# Altium PCB Mach khoa so dien tu - Bao.PcbDoc
Units mm, origin at the board's own origin, x right, y up, seen from the top; angles counter-clockwise.
Board outline 125.35 x 56.13 mm, 2 copper layers (Top Layer, Bottom Layer); 26 components, 29 nets, 102 pads, 0 vias.
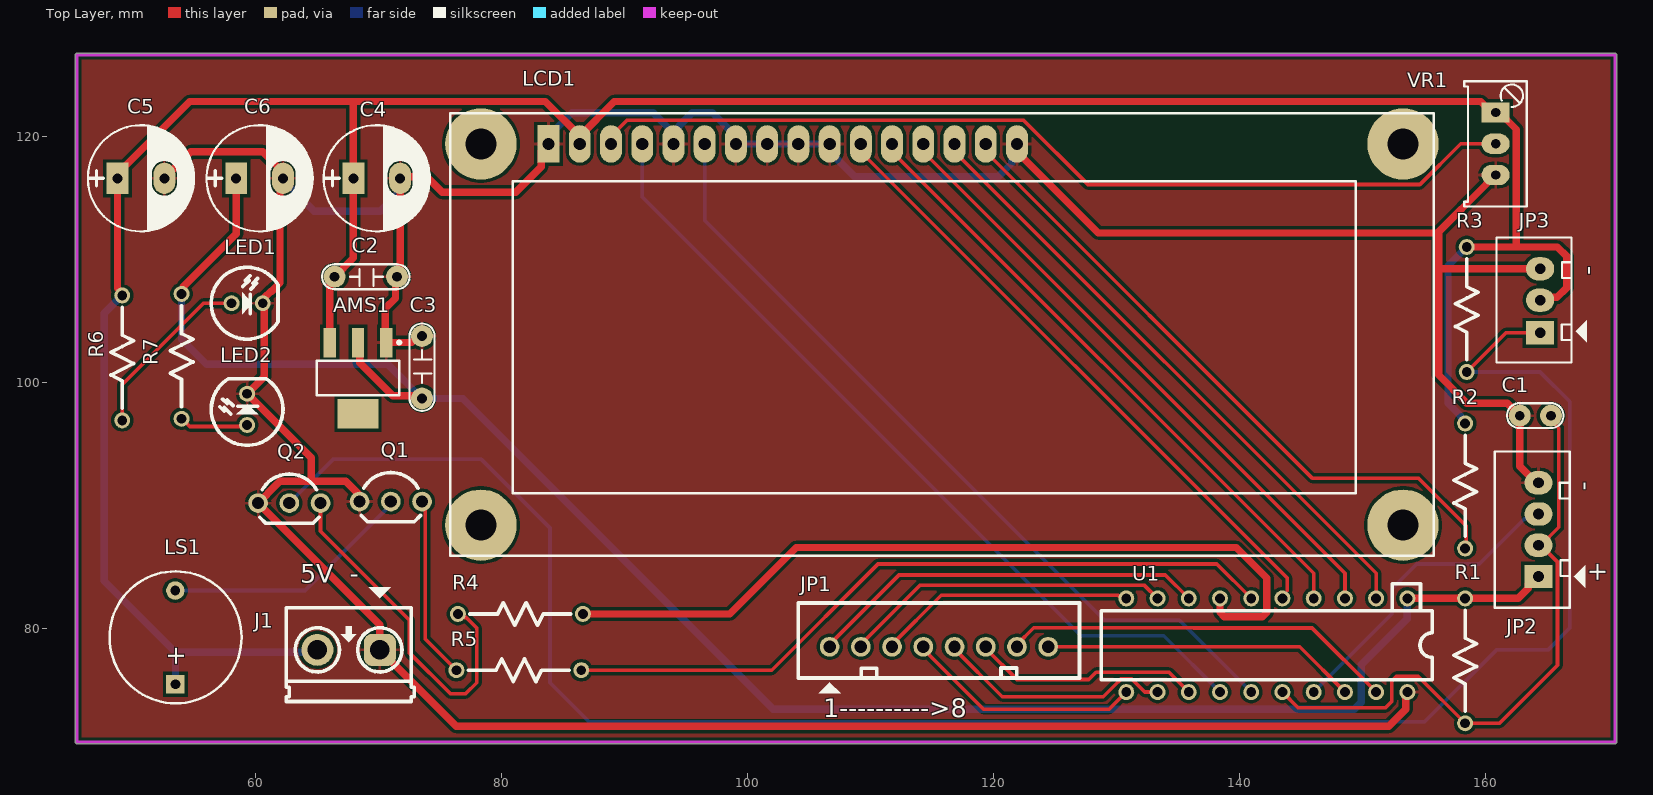
[diagram p0: Top Layer view]
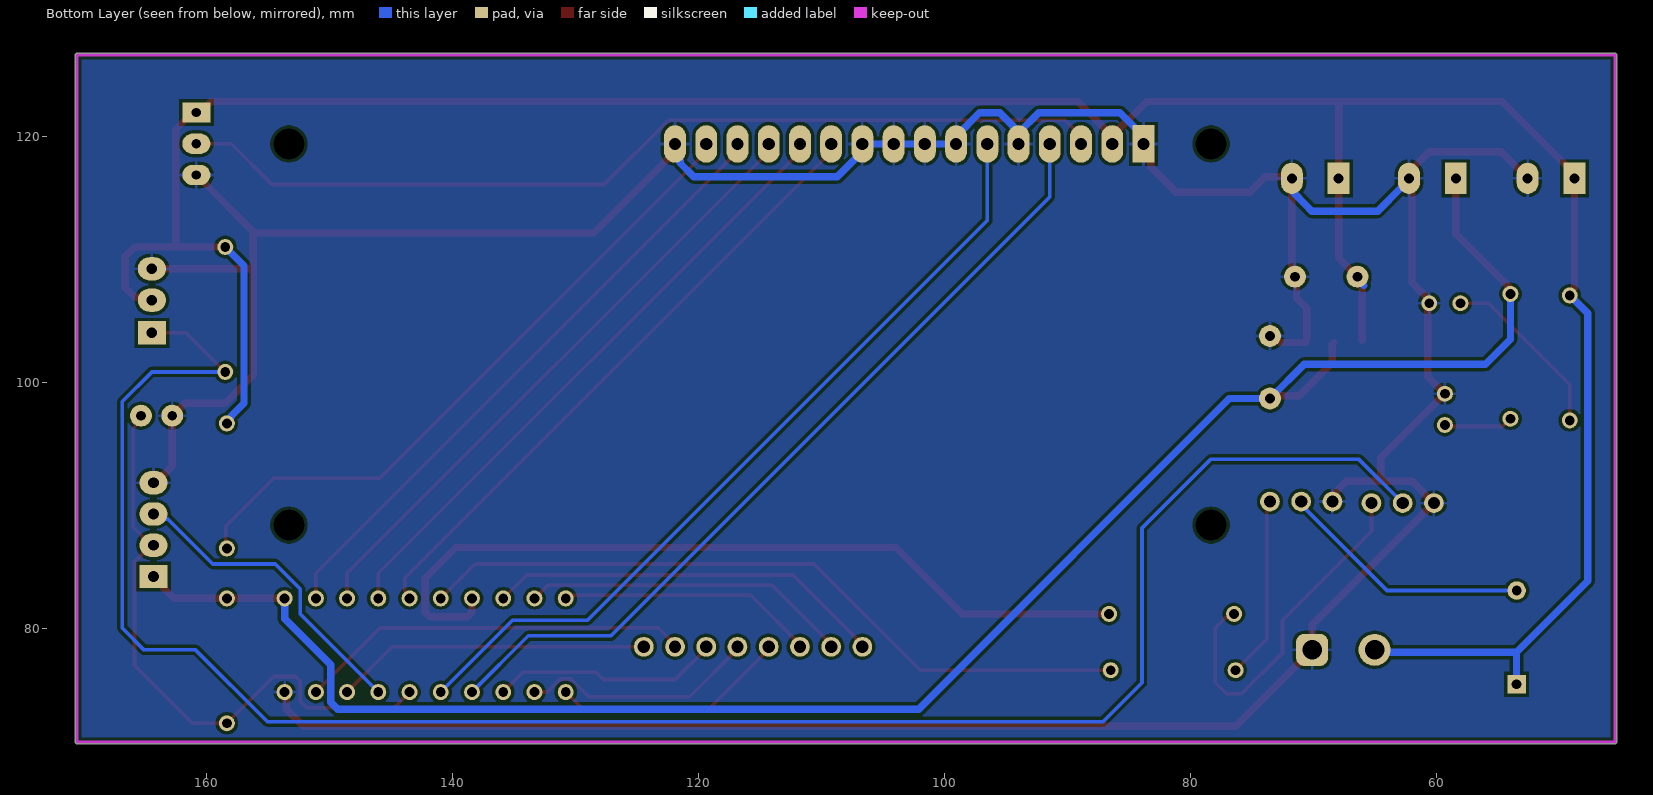
[diagram p1: Bottom Layer view, seen from below]

## Layer stack, top to bottom
Top Solder: solder mask 0.0102, Solder Resist, Dk 3.5
Top Layer: signal copper 0.0356
Dielectric 1: dielectric 0.32, FR-4, Dk 4.8
Bottom Layer: signal copper 0.0356
Bottom Solder: solder mask 0.0102, Solder Resist, Dk 3.5

## Board outline
45.466,70.612 cw(c45.466,70.739) 45.339,70.739 45.339,126.619 cw(c45.466,126.619) 45.466,126.746 170.561,126.746 cw(c170.561,126.619) 170.688,126.619 170.688,70.739 cw(c170.561,70.739) 170.561,70.612

## Design rules (kind name [scope] priority, off if disabled: settings)
Clearance [All] p1: gap=0.254 ignorepadtopadclearanceinfootprint=FALSE except(0: Arc-Hole Track-Hole SMDPad-Hole THPad-Hole Via-Hole Fill-Hole Poly-Hole Region-Hole Text-Hole)
PolygonConnect [All] p1: connectstyle=Relief reliefconductorwidth=0.254 reliefentries=4 polygonreliefangle="90 Angle" airgapwidth=0.254
RoutingVias [All] p1: holewidth=0.711 width=1.27 viastyle="Through Hole" minholewidth=0.711 minwidth=1.27 maxholewidth=0.711 maxwidth=1.27
SolderMaskExpansion [All] p1: expansion=0.102 istentingtop=FALSE
Width "Width power" [InNetClass('power ')] p1: maxlimit=1 minlimit=0.2 preferedwidth=0.6
Width "Width signal" [InNetClass('signal')] p2: maxlimit=0.5 minlimit=0.1 preferedwidth=0.3
30 further rules are at their usual default settings.

## Classes and differential pairs
net class signal: "DATA 4" "DATA 5" "DATA 6" "DATA 7" "KEY 1" "KEY 2" "KEY 3" "KEY 4" "KEY 5" "KEY 6" "KEY 7" "KEY 8" "LCD EN" "LCD RS" NetJP3_1 NetLCD1_3 NetLCD1_15 NetLED1_1 NetLED2_1 NetLS1_2 NetQ1_3 NetQ2_3 RST SPEAKER TEST
net class power: 3.3V 5V GND MOTOR
component class "nl mạch khóa số điện tử": C1 C5 J1 JP1 JP3 LED1 LED2 LS1 Q1 Q2 R1 R2 R3 R4 R5 R6 R7 U1

## Components (designator, comment, footprint, x,y, rotation, side; value= is the part's Value field where it differs from the comment)
AMS1 "AMS1117-3.3V" SOT223 68.326,100.33 r180 top value="AMS1117-3.3V SOT223"
C1 "100pF" CN1 165.354,97.282 r180 top
C2 "104" CN2 71.501,108.585 r180 top value=0.1uF
C3 "104" CN2 73.533,103.759 r270 top value=0.1uF
C4 "1000uF/16V" CP1.5/3.4 67.945,116.586 r0 top
C5 "1000uF/16V" CP1.5/3.4 48.768,116.586 r0 top
C6 "1000uF/16V" CP1.5/3.4 58.42,116.586 r0 top
J1 "OSTTC-02-2162" STB02 67.564,78.232 r180 top value="Terminal Block"
JP1 "JP8" CON8 115.57,78.486 r0 top value="Connector 8"
JP2 "JP4" CON4 164.338,84.201 r90 top value="Connector 4"
JP3 "JP3" CON3 164.465,104.14 r90 top value="Connector 3"
LCD1 "LCD 16x2A" LCD16x2 83.82,119.38 r0 top value=LCD16x2A
LED1 "RED LED 5mm" LED5R 58.039,106.426 r0 top
LED2 "LED_G_5" LED5G 59.309,96.52 r90 top value=Green
LS1 "Coi Chip Speaker" "Coi Chip Speacker" 53.48,75.438 r90 top
Q1 "2SC1815" 2SC1815 70.993,90.297 r0 top
Q2 "2SC1815" 2SC1815 62.738,90.17 r0 top
R1 "Res1/4W" CFR25S 158.369,72.263 r90 top value=1K
R2 "Res1/4W" CFR25S 158.369,86.487 r90 top value=1K
R3 "Res1/4W" CFR25S 158.496,110.998 r270 top value=1K
R4 "Res1/4W" CFR25S 86.614,81.153 r180 top value=1K
R5 "Res1/4W" CFR25S 86.487,76.581 r180 top value=1K
R6 "Res1/4W" CFR25S 49.149,107.061 r270 top value=1K
R7 "Res1/4W" CFR25S 53.975,107.188 r270 top value=1K
U1 "MSP430G2252IN20" MSP430G2552 153.67,82.423 r180 top
VR1 "10K" VR1 160.842,121.937 r270 top value="VR 10K"

## Footprints (in the part's own frame and the unit in brackets; to place one, negate y for a bottom-side part, rotate by r counter-clockwise, add the part's x,y. Pads: shape width x height; smd on the part's side, far side on the other; paste and mask are expansions set on the pad)
2SC1815 [mm] "TO-92 Body Dia. 4.5mm; Leads 0.51 x 0.48 mm (max)"
  round 1.6 hole 1 mask+0.1: 1(-2.54,0) 2(0,0)
  round 1.6 hole 1: 3(2.54,0)
  silkscreen extent -2.41,-1.65 2.41,2.37, body extent -2.79,-1.59 2.79,2.61, height 10
CFR25S [mm] "RESISTOR_1/4W"
  round 1.3 hole 0.8: 1(0,0) 2(10.16,0)
  silkscreen extent 0.98,-0.92 9.18,0.92, body extent -0.3,-1.16 10.47,1.16, height 2.93
CN1 [mil]
  round 70 hole 31: 1(0,0) 2(100,0)
  silkscreen extent -40,-40 141,40, body extent -60,-30 170,37, height 265
CN2 [mil]
  round 70 hole 31: 1(0,0) 2(200,0)
  silkscreen extent -40,-40 240,40, body extent -54,-44 260,55, height 407
"Coi Chip Speacker" [mm]
  rect 1.5x1.5 hole 0.8: 1(0,0)
  round 1.5 hole 0.8: 2(7.62,0.013)
  silkscreen extent -1.55,-5.38 9.18,5.36, body extent -2.22,-6 13.24,6, height 4.5
CON3 [mil] "CON 3"
  rect 75x90 hole 34: 1(-5,0)
  oval 75x90 hole 34: 2(100,0) 3(200,0)
  silkscreen extent -100,-150 300,140, body extent -95,-90 295,136, height 276
CON4 [mil] "CON4"
  rect 75x90 hole 34: 1(0,0)
  oval 75x90 hole 34: 2(100,0) 3(200,0) 4(300,0)
  silkscreen extent -100,-150 400,140, body extent -90,-90 398,136, height 276
CON8 [mm] "CON8"
  round 1.6 hole 1 mask+0.1: 1(-8.89,0) 2(-6.35,0) 3(-3.81,0) 4(-1.27,0) 5(1.27,0) 6(3.81,0) 7(6.35,0) 8(8.89,0)
  silkscreen extent -11.43,-3.8 11.43,3.56, body extent -11.3,-2.29 11.3,3.41, height 7
CP1.5/3.4 [mil] "Tu hoa 220->470uF,16V, 470uF/16V,25V"
  rect 70x100 hole 32: 1(0,0)
  oval 70x100 hole 32: 2(150,0)
  silkscreen extent -95,-170 245,170, body extent -85,-157 230,157, height 446
LCD16x2 [mm] "LCD dipslay 16x2, 16 pin"
  rect 1.778x3.048 hole 1: 1(0,0)
  oval 1.778x3.048 hole 1: 2(2.54,0) 3(5.08,0) 4(7.62,0) 5(10.16,0) 6(12.7,0) 7(15.24,0) 8(17.78,0) 9(20.32,0) 10(22.86,0) 11(25.4,0) 12(27.94,0) 13(30.48,0) 14(33.02,0) 15(35.56,0) 16(38.1,0)
  round 5.8 / inner round 0 / far side round 0 hole 2.5 unplated: M1(-5.5,0) M2(69.5,0) M3(-5.5,-31) M4(69.5,-31)
  silkscreen extent -8,-33.5 72,2.5, body extent -8.13,-34.47 72.37,2.03, height 18.14
LED5G [mm] "LED, GREEN, 2 LEAD, 5mm"
  round 1.3 hole 0.8: 1(0,0) 2(2.54,0)
  silkscreen extent -1.65,-2.92 3.77,2.92, body extent -1.71,-3.01 3.71,3.01, height 12.31
LED5R [mm] "LED, RED, 2 LEAD, 5mm"
  round 1.3 hole 0.8: 1(0,0) 2(2.54,0)
  silkscreen extent -1.65,-2.92 3.77,2.92, body extent -1.71,-3.01 3.71,3.01, height 12.31
MSP430G2552 [mm] "DIP 20, 20 PIN, W 300mil, Pin to pin 100mil"
  round 1.3 hole 0.8: 1(0,0) 2(2.54,0) 3(5.08,0) 4(7.62,0) 5(10.16,0) 6(12.7,0) 7(15.24,0) 8(17.78,0) 9(20.32,0) 10(22.86,0) 11(22.86,7.62) 12(20.32,7.62) 13(17.78,7.62) 14(15.24,7.62) 15(12.7,7.62) 16(10.16,7.62) 17(7.62,7.62) 18(5.08,7.62) 19(2.54,7.62) 20(0,7.62)
  silkscreen extent -2.03,-1.19 24.89,6.61, body extent -2.31,-0.46 24,8.18, height 3.94
SOT223 [mm]
  rect 1x2.4 smd: 1(-2.3,-2.9) 2(0,-2.9) 3(2.3,-2.9)
  rect 3.3x2.4 smd: 4(0,2.9)
  silkscreen extent -3.48,-3.02 3.35,1.4, body extent -3.25,-3.56 3.25,3.4, height 1.68
STB02 [mm] "Connector; Screw Terminal block; 2 Position; Blue"
  rrect50% 2.6x2.6 hole 1.6: 1(-2.54,0)
  round 2.6 hole 1.6: 2(2.54,0)
  silkscreen extent -5.33,-5.08 5.08,4.19, body extent -5.68,-4.05 5.08,4.95, height 12.5
VR1 [mil] "Variable Resistor"
  rect 65x90 hole 30: 1(0,0)
  oval 65x90 hole 30: 2(100,0) 3(200,0)
  silkscreen extent -100,-100 301,100, body extent -88,-130 288,110, height 455

## Part data
AMS1: library part "AMS1117 SMD", "Dán", Chung_Loai=Dán, Don_Vi=Con, Ma_Hang=MH000596
C1: library part CN1, "Cap np  1pF - 472pF"
C2 C3: library part CN2, "Cap np 104 => 105pF"
C4 C5 C6: library part CP4, "Cap 1000uF/16V - 220uF/50V", Description 1="2200uF-3300uF/6,3V - 1000uF-2200uF/10V", Description 2="1000uF/16V - 470uF => 1000uF/25V - 100uF/100V", Description 3=330uF>470uF/35V_220uF>470uF/50V_10uF>22uF/250V, Description 4="220uF => 330uF/63V - 10uF =>33uF/160 - 200V", Description 5="4,7uF>10uF/250V_3,3uF>10uF/400V - 2,2uF>4,7uF/450V"
J1: "Terminal Block 2 Poles 5.08mm Blue", ComponentLink1Description=Datasheet, ComponentLink1URL="D:\Dropbox\Datasheets\Passive Components\Connectors\OSTTC-XX-2162.pdf", Unit Price=0.076
JP1: library part Con8, "Connector 8"
JP2: library part Con4, "Connector 4"
JP3: library part Con3, "Connector 3"
LCD1: library part LCD16x2A, "LCD dipslay 16 char, 2 line"
LED1: library part LED_RED_5MM_1, "LED Red 5mm", Color=Red, Current - Test=10mA, manufacturer="Broadcom Limited", Manufacturer Part Number=HLMP-3316, Millicandela Rating=60mcd, Package / Case=Radial, Supplier Device Package="T-1 3/4", Supplier Part Number 1=516-1335-ND, Voltage - Forward (Vf) (Typ)=1.9V, BuyLink=http://www.tme.vn/Product.aspx?id=1277#page=pro_info, Category=Optoelectronics, ComponentLink1Description=https://docs.broadcom.com/docs/AV02-1023EN, ComponentLink1URL=https://docs.broadcom.com/docs/AV02-1023EN, Cost (VNĐ)=1000, Features=-, Height (Max)=9.19mm, Lens Color=Red, Lens Style/Size="Round with Domed Top, 5mm (T-1 3/4), 4.83mm", Lens Transparency=Clear, Mounting Type="Through Hole", Packaging=Bulk, Part Status=Active, Pricing 1="1=0.41, 10=0.294, 25=0.24, 100=0.192, 250=0.162, 500=0.138, 1000=0.108, 2500=0.099 (USD)", RoHS="RoHS Compliant", Size / Dimension=-, Stock 1=11943, Supplier 1=Digi-Key, Viewing Angle=35°, Wavelength - Dominant=626nm, Wavelength - Peak=635nm
LED2: library part LED_GREEN_5MM, "LED Green 5mm", ComponentLink1Description=Datasheet, ComponentLink1URL="D:\Dropbox\Datasheets\Opto and Illumination\LEDs\SMD LED.pdf", Unit Price=0.0476
LS1: "Còi chip"
Q1 Q2: "Trans NPN 50V 150mA TO-92", ComponentLink1Description=Datasheet, ComponentLink1URL="D:\Dropbox\Datasheets\Transistors\P Channel Bipolar\2SC1815.pdf", Unit Price=0.0143
R1 R2 R3 R4 R5 R6 R7: "Resistor", LatestRevisionDate=17-Jul-2002, LatestRevisionNote="Re-released for DXP Platform.", PackageDescription="Axial Device, Thru-Hole; 2 Leads; 0.3 in Pin Spacing", PackageReference=AXIAL-0.3, Published=8-Jun-2000, Publisher="Altium Limited"
U1: "MCU 16bit 16KB 1.8-3.6V 16MHz DIP20", ComponentLink1Description=Datasheet, ComponentLink1URL="D:\Dropbox\Datasheets\Microcontrolers\MSP430\MSP430x2xx Family\MSP430G2553.pdf", Unit Price=1.0000
VR1: library part VR2, "Var Resistor"

## Nets (pads, with @x,y where several pads share a name; then routed paths per layer and width w, separated by ;. In a path a pad name is that pad's centre, name@x,y a point inside that pad or via, vN(x,y) a via of type N, cw(c..) or ccw(c..) an arc to the next point about the centre after c; other vN are vias at no path point)
3.3V: AMS1.2 C3.2 C6.1 JP2.1 R1.2 R7.1 U1.1 | length 154.1
  Top Layer w0.6: R7.1 54.109,107.322 54.109,107.769 58.42,112.08 C6.1@58.42,116.459 ; AMS1.2 68.461,103.095 68.461,101.592 71.149,98.904 73.308,98.904 C3.2 ; U1.1 R1.2@158.877,82.423 ; R1.2@158.75,82.423 162.618,82.423 ; 162.687,82.423 163.495,83.231 JP2.1@163.495,83.548 ; JP2.1@164.147,84.201 JP2.1 ; JP2.1@164.211,84.074 164.02,84.074 JP2.1@163.495,83.548 ; JP2.1@164.306,84.042 163.989,84.042 JP2.1@163.495,83.548
  Bottom Layer w0.6: R7.1 53.975,103.505 56.007,101.473 70.739,101.473 C3.2 76.835,98.679 102.108,73.406 149.352,73.406 149.926,73.98 149.926,77.028 153.67,80.772 U1.1
5V: AMS1.3 C2.2 C4.1 C5.1 J1.2 JP3.2 LCD1.2 LS1.1 R2.2 R3.1 R6.1 VR1.1 | length 236.6
  Top Layer w0.6: R6.1 49.149,107.25 48.768,107.631 48.768,116.967 54.635,122.834 67.945,122.834 ; AMS1.3@66.04,103.423 66.04,107.885 66.421,108.266 C2.2 67.945,110.109 67.945,116.713 67.945,122.834 ; LCD1.2 LCD1.2@86.36,120.015 ; R3.1 162.539,110.998 ; JP3.2 164.699,106.914 165.842,106.914 166.624,107.696 166.624,110.236 165.862,110.998 162.539,110.998 ; 67.945,122.834 83.562,122.834 86.36,120.036 LCD1.2@86.36,120.015 ; LCD1.2@86.36,120.015 89.179,122.834 159.628,122.834 160.525,121.937 161.16,121.937 162.539,120.558 162.539,110.998
  Bottom Layer w0.6: R6.1 47.696,105.608 47.696,83.838 53.48,78.054 ; LS1.1 53.48,78.054 ; J1.2 64.846,78.054 53.48,78.054 ; 65.891,107.866 66.61,108.585 C2.2@66.929,108.585 ; R2.2 158.369,96.836 158.019,97.186 158.019,97.251 156.972,98.298 156.972,109.474 R3.1
"DATA 4": LCD1.11 U1.5 | length 50.7
  Top Layer w0.3: LCD1.11 109.22,118.745 143.891,84.074 143.891,83.058
"DATA 5": LCD1.12 U1.4 | length 51.2
  Top Layer w0.3: LCD1.12 111.76,118.745 146.05,84.455 U1.4
"DATA 6": LCD1.13 U1.3 | length 51.2
  Top Layer w0.3: LCD1.13 114.3,118.745 148.59,84.455 U1.3
"DATA 7": LCD1.14 U1.2 | length 51.2
  Top Layer w0.3: LCD1.14 116.84,118.745 151.13,84.455 U1.2
GND: AMS1.1 C1.2 C2.1 C3.1 C4.2 C5.2 C6.2 J1.1 JP2.4 JP3.3 LCD1.1 LCD1.5 LCD1.7 LCD1.8 LCD1.9 LCD1.10 LCD1.16 LED1.2 LED2.2 Q1.1 Q2.1 U1.20 VR1.3 | length 323.8
  Top Layer w0.6: C5.2 52.578,116.648 53.122,117.192 53.184,117.192 54.737,118.745 60.579,118.745 C6.2@62.23,117.094 ; C6.2 62.23,115.886 61.979,115.635 61.979,108.08 61.31,107.411 61.245,107.411 60.706,106.872 60.706,100.457 LED2.2 64.516,93.853 64.516,91.948 ; Q1.1@68.707,90.297 68.707,90.568 67.327,91.948 64.516,91.948 ; AMS1.1@70.553,103.474 70.553,106.015 71.374,106.836 71.374,108.458 C2.1 ; AMS1.1 72.685,103.23 73.214,103.759 C3.1 C3.1@73.533,103.537 ; C2.1@71.755,108.585 71.726,108.614 71.726,109.497 71.755,109.525 71.755,116.713 73.914,116.713 75.184,115.443 81.153,115.443 83.231,117.521 83.231,118.791 LCD1.1 ; LCD1.16 121.92,118.745 128.524,112.141 156.21,112.141 ; U1.20 153.543,74.676 153.543,73.406 152.146,72.009 76.327,72.009 J1.1 70.104,80.264 Q2.1 61.722,91.694 61.976,91.948 64.516,91.948 ; VR1.3 160.809,116.857 160.064,116.111 160.064,116.078 156.21,112.225 156.21,112.141 ; JP3.3 156.21,109.22 ; JP2.4@164.528,91.821 JP2.4 164.147,91.821 162.814,93.154 C1.2 161.798,98.298 158.496,98.298 156.21,100.584 156.21,109.22 ; 156.21,109.22 156.21,112.141
  Bottom Layer w0.6: C6.2@62.23,116.397 62.774,115.853 62.836,115.853 64.77,113.919 70.134,113.919 70.681,114.467 71.53,115.315 71.53,116.488 C4.2@71.755,116.713 ; LCD1.1 83.82,120.015 85.725,121.92 92.329,121.92 93.98,120.269 LCD1.5 93.98,120.015 93.98,120.334 94.455,120.808 94.455,120.871 95.504,121.92 97.155,121.92 99.06,120.015 LCD1.7 LCD1.8 LCD1.9 LCD1.10 106.68,118.745 108.712,116.713 120.396,116.713 121.509,117.826 121.509,118.015 121.92,118.426 LCD1.16
"KEY 1": JP1.1 U1.8 | length 32.5
  Top Layer w0.3: JP1.1 106.68,78.676 112.331,84.328 133.985,84.328 U1.8
"KEY 2": JP1.2 U1.9 | length 26.7
  Top Layer w0.3: JP1.2 109.22,78.676 114.021,83.477 132.296,83.477 U1.9
"KEY 3": JP1.3 U1.10 | length 21
  Top Layer w0.3: JP1.3 111.76,78.676 115.76,82.677 130.134,82.677 130.197,82.614 130.619,82.614 U1.10
"KEY 4": JP1.4 U1.11 | length 19.3
  Top Layer w0.3: JP1.4 114.3,78.295 119.189,73.406 129.413,73.406 U1.11
"KEY 5": JP1.5 U1.12 | length 19.3
  Top Layer w0.3: JP1.5 116.84,78.295 120.713,74.422 128.938,74.422 129.781,75.265 130.373,75.857 131.247,75.857 131.839,75.265 132.301,74.803 U1.12
"KEY 6": JP1.6 U1.13 | length 18.6
  Top Layer w0.3: JP1.6 119.38,78.354 121.917,75.816 121.92,75.819 127.762,75.819 128.354,76.411 134.282,76.411 U1.13
"KEY 7": JP1.7 U1.19 | length 32.1
  Top Layer w0.3: JP1.7 121.92,78.676 123.276,80.033 136.26,80.033 136.283,80.01 145.923,80.01 U1.19
"KEY 8": JP1.8 U1.18 | length 25.7
  Top Layer w0.3: JP1.8 144.907,78.486 U1.18
"LCD EN": LCD1.6 U1.15 | length 66.6
  Bottom Layer w0.3: LCD1.6 96.52,113.157 129.032,80.645 135.128,80.645 U1.15
"LCD RS": LCD1.4 U1.14 | length 68
  Bottom Layer w0.3: LCD1.4 91.44,115.062 127.127,79.375 133.858,79.375 U1.14
MOTOR: R4.1 U1.7 | length 66.9
  Top Layer w0.6: R4.1 98.552,81.153 103.955,86.556 139.757,86.556 142.24,84.073 142.24,81.292 141.889,80.941 138.781,80.941 138.43,81.292 U1.7
NetJP3_1: JP3.1 Q2.2 R3.2 | length 160.1
  Top Layer w0.3: R3.2 161.671,104.013 JP3.1
  Bottom Layer w0.3: Q2.2 66.294,93.726 78.359,93.726 83.947,88.138 83.947,75.565 87.122,72.39 155.067,72.39 160.909,78.232 165.1,78.232 166.878,80.01 166.878,98.425 164.465,100.838 R3.2
NetLCD1_3: LCD1.3 VR1.2 | length 76.7
  Top Layer w0.3: LCD1.3 88.9,120.015 90.193,121.308 122.456,121.308 127.688,116.076 154.689,116.076 158.01,119.397 VR1.2
NetLCD1_15: LCD1.15 R2.1 | length 54.2
  Top Layer w0.3: LCD1.15 119.38,118.745 145.923,92.202 154.559,92.202 158.46,88.301 158.46,86.578 R2.1
NetLED1_1: LED1.1 R6.2 | length 14.5
  Top Layer w0.3: R6.2 49.149,99.822 55.753,106.426 LED1.1
NetLED2_1: LED2.1 R7.2 | length 5.6
  Top Layer w0.3: R7.2 54.012,97.028 54.647,96.393 59.182,96.393 LED2.1
NetLS1_2: LS1.2 Q1.2 | length 20.8
  Bottom Layer w0.3: LS1.2 64.008,83.058 Q1.2@71.247,90.297
NetQ1_3: Q1.3 R5.2 | length 14.8
  Top Layer w0.3: Q1.3@73.787,90.297 73.787,79.121 R5.2
NetQ2_3: Q2.3 R4.2 | length 28.8
  Top Layer w0.3: Q2.3 65.278,87.884 72.517,80.645 72.517,77.978 75.819,74.676 77.089,74.676 77.978,75.565 77.978,80.01 77.122,80.866 77.012,80.866 76.725,81.153 R4.2
RST: C1.1 JP2.2 R1.1 U1.16 | length 50
  Top Layer w0.3: U1.16 144.78,73.533 151.892,73.533 152.4,74.041 152.4,75.692 152.781,76.073 154.559,76.073 R1.1 ; R1.1@158.75,72.263 161.163,72.263 165.885,76.985 165.885,85.385 JP2.2@164.528,86.741 ; JP2.2 JP2.2@164.528,86.741 ; C1.1 165.354,96.898 165.989,96.263 165.989,88.201 JP2.2@164.528,86.741
SPEAKER: R5.1 U1.6 | length 59.2
  Top Layer w0.3: R5.1 101.981,76.581 110.617,85.217 138.176,85.217 U1.6
TEST: JP2.3 U1.17 | length 25.7
  Top Layer w0.3: U1.17 U1.17@146.321,74.803
  Bottom Layer w0.3: U1.17 152.4,81.153 152.4,83.185 154.432,85.217 159.512,85.217 163.17,88.875 163.307,88.875 163.713,89.281 JP2.3
pads on no net: AMS1.4 LCD1.M1 LCD1.M2 LCD1.M3 LCD1.M4

## Polygon pours and split planes (outlines as drawn)
GND on Top Layer "GND_L01_P000" (solid, remove dead copper, pour order 0): 45.593,126.492 170.434,126.492 170.434,70.866 45.593,70.866
GND on Bottom Layer "GND_L02_P001" (solid, remove dead copper, pour order 1): 45.847,126.238 45.847,71.12 170.18,71.12 170.18,126.238

## Keep-outs
Keep-Out Layer:
  lines w0.254: 45.466,70.739 45.466,126.619 170.561,126.619 170.561,70.739 45.466,70.739

## Silkscreen, mask and mechanical layers (free items; w line width, h text height)
Top Overlay:
  text "-" at 169.037,108.712 h1.52 r90
  text "-" at 168.656,91.186 h1.52 r90
  text "5V  -" at 63.627,83.693 h1.52
  text "+" at 169.799,83.693 h1.52 r90
  text "1---------->8" at 106.172,72.771 h1.52

## Text inside footprints (layer, text, board x,y; h text height)
JP1: Top hình chiếu bằng "1" at 106.57,78.086 h1; Top hình chiếu bằng "8" at 124.17,77.986 h1
LS1: Top Overlay "+" at 54.191,76.848 h1.52 r90
Q1: Mechanical 1 "E" at 68.199,89.916 h0.8; Mechanical 1 "C" at 70.739,89.916 h0.8; Mechanical 1 "B" at 73.279,89.916 h0.8
Q2: Mechanical 1 "E" at 59.944,89.789 h0.8; Mechanical 1 "C" at 62.484,89.789 h0.8; Mechanical 1 "B" at 65.024,89.789 h0.8
U1: Mechanical 1 "20" at 154.64,77.313 h1.2 r180; Mechanical 1 "11" at 131.54,77.313 h1.2 r180; Mechanical 1 "10" at 131.54,81.013 h1.2 r180; Mechanical 1 "1" at 153.94,81.113 h1.2 r180